# Altium PCB 106729.PcbDoc
Units mil, origin at the board's own origin, x right, y up, seen from the top; angles counter-clockwise.
Board outline 3550 x 5159.72 mil, 2 copper layers (Top Layer, Bottom Layer); 38 components, 39 nets, 135 pads, 78 vias.
Unrouted connection lines stored in the file: 9.
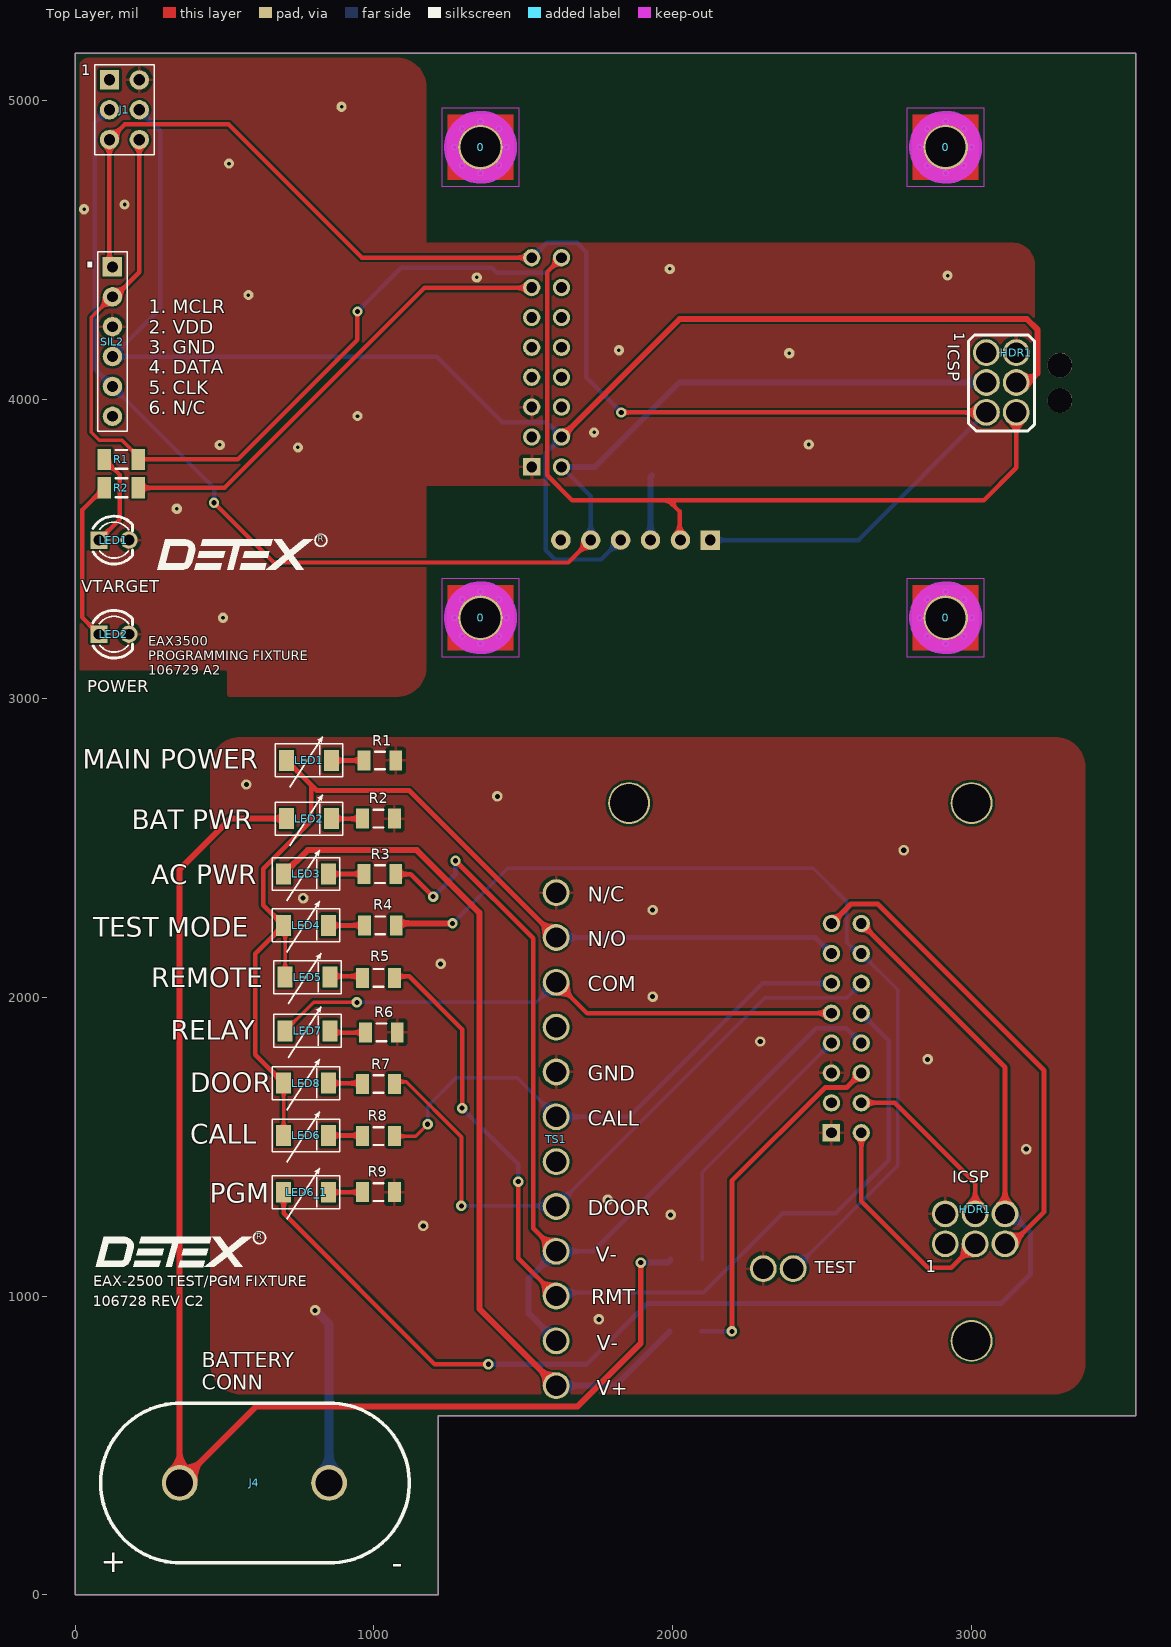
[diagram p0: Top Layer view]
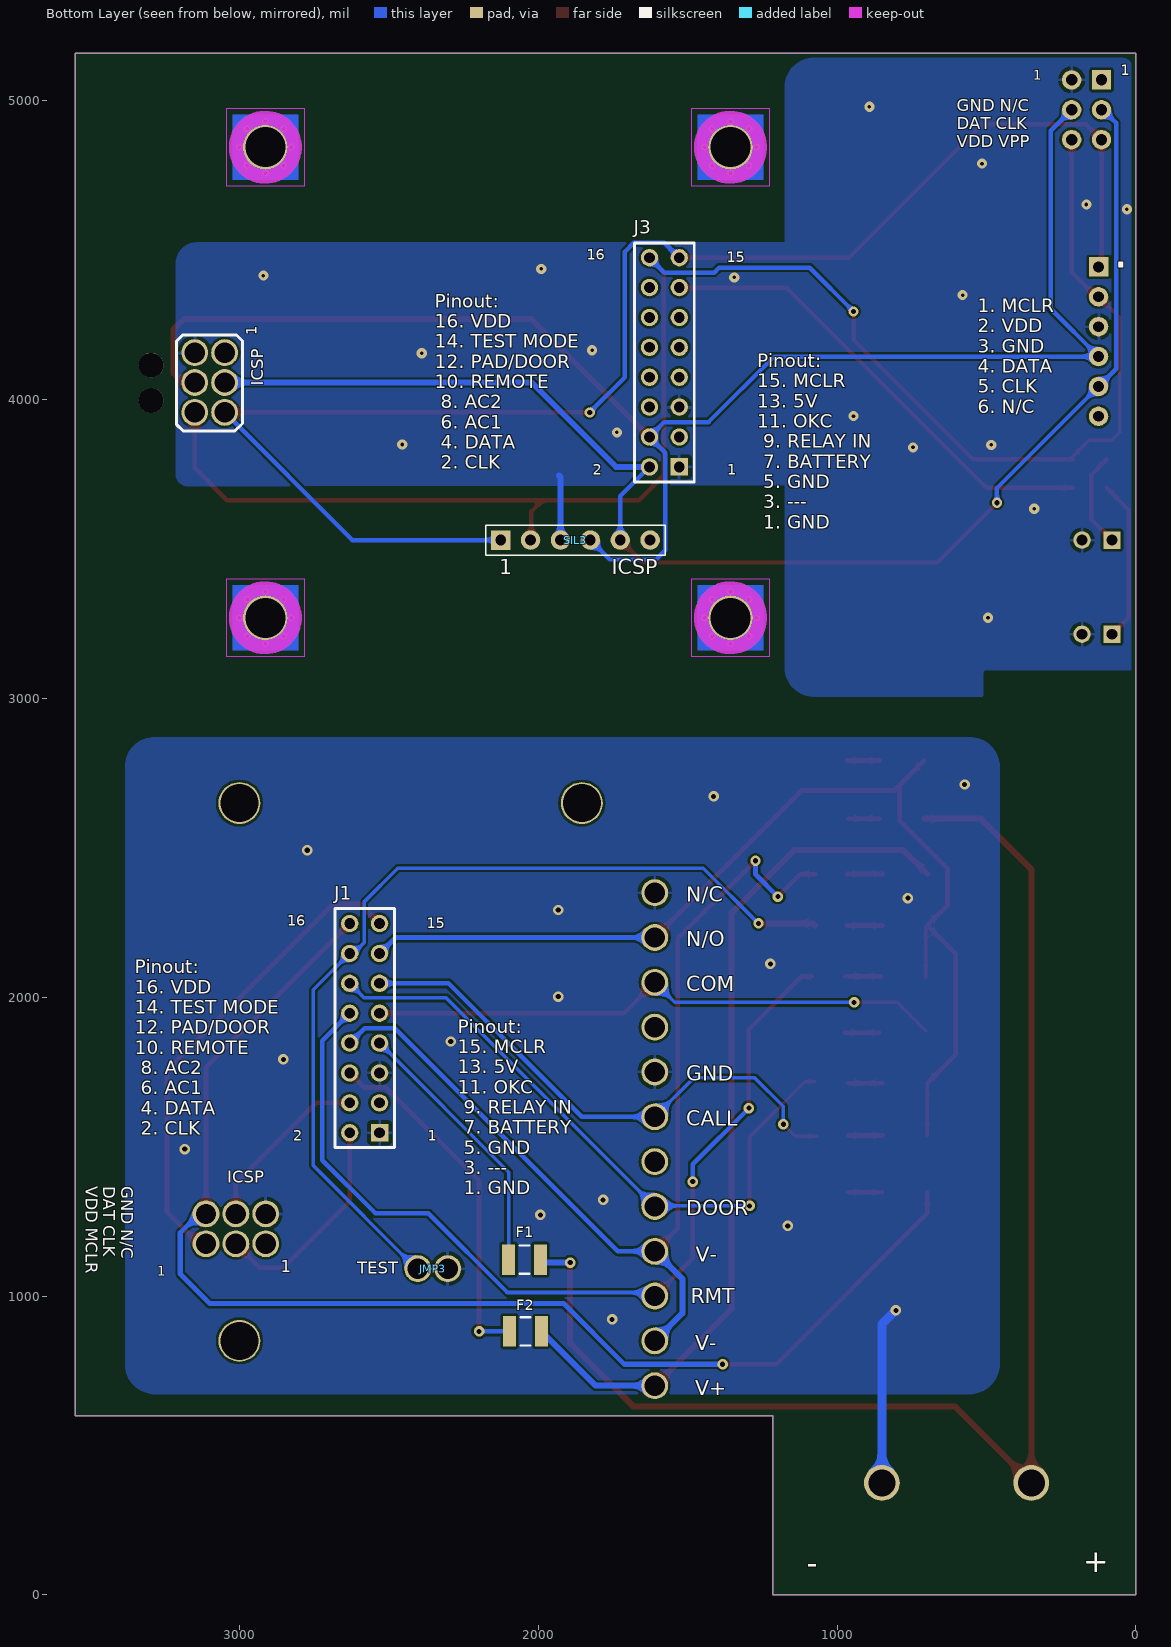
[diagram p1: Bottom Layer view, seen from below]

## Layer stack, top to bottom
Top Solder: solder mask 0.4, Solder Resist, Dk 3.5
Top Layer: signal copper 1.4
Dielectric1: dielectric 12.6, FR-4, Dk 4.8
Bottom Layer: signal copper 1.4
Bottom Solder: solder mask 0.4, Solder Resist, Dk 3.5

## Board outline
0,0 1215,0 1215,600 3550,600 3550,5159.72 0,5159.72

## Design rules (kind name [scope] priority, off if disabled: settings)
AssemblyTestPointUsage [All] p1: valid=2
BoardOutlineClearance [All] p1: gap=15 ignorepadtopadclearanceinfootprint=FALSE
Clearance [All] p1: gap=8 ignorepadtopadclearanceinfootprint=FALSE except(0: Arc-Hole Track-Hole SMDPad-Hole THPad-Hole Via-Hole Fill-Hole Poly-Hole Region-Hole Text-Hole)
ComponentClearance [All] p1 off: gap=10 collisioncheckmode=3 verticalgap=10 showdistances=FALSE
FabricationTestPointUsage TestPointUsage [All] p1 off: valid=0 allowmultiple=FALSE
FabricationTestpoint Testpoint [All] p1 off: side=3 testpointundercomponent=TRUE minsize=40 maxsize=100 preferedsize=60 minholesize=0 maxholesize=40 preferedholesize=32 testpointgrid=1 allowsidetop=TRUE allowsidebottom=TRUE usegrid=TRUE gridtolerance=0.01
FanoutControl Fanout_BGA [IsBGA] p1 off: bgadir=Out bgaviamode=Centered fanoutstyle=Auto fanoutdirection=Alternating viagrid=1 // Fanout_BGA (Default Rule)
Height [All] p1 off: minheight=0 maxheight=1000 prefheight=500
HoleSize [All] p1: absolutevalues=TRUE maxlimit=200 minlimit=1 maxpercent=80.000 minpercent=20.000
HoleToHoleClearance [All] p1: gap=8 allowstackedmicrovias=TRUE
MinimumSolderMaskSliver [All] p1: minsoldermaskwidth=7
PlaneClearance [All] p1: clearance=15
PlaneConnect [All] p1: planeconnectstyle=Relief reliefexpansion=20 reliefentries=4 reliefconductorwidth=10 reliefairgap=15
PolygonConnect "Direct Connect Vias" [IsVia] p1: connectstyle=Direct reliefconductorwidth=10 reliefentries=4 polygonreliefangle="90 Angle" airgapwidth=12
PolygonConnect [All] p2: connectstyle=Relief reliefconductorwidth=10 reliefentries=4 polygonreliefangle="90 Angle" airgapwidth=12
RoutingVias [All] p1: holewidth=22 width=35 viastyle="Through Hole" minholewidth=17 minwidth=30 maxholewidth=28 maxwidth=50
SilkToSilkClearance [All] p1 off: silktosilkclearance=10
SilkToSolderMaskClearance SilkscreenOverComponentPads [IsPad] p1 off: minsilkscreentomaskgap=6 clearancetoexposedcopper=TRUE
SolderMaskExpansion [All] p1: expansion=4
UnConnectedPin [(InPadClass('All Pads'))] p1:
UnRoutedNet [All] p1: checkbadconnections=TRUE
Width [All] p1: maxlimit=200 minlimit=7 preferedwidth=12
16 further rules are at their usual default settings.

## Classes and differential pairs
component class 106728_C1: 0 F1 F2 J3
component class 106729_revA0: J3 LED1 R1 SIL2 SIL3

## Components (designator, comment, footprint, x,y, rotation, side; value= is the part's Value field where it differs from the comment)
0 "Comment" Mounting-Hole-Altium 1356.69,3269.96 r180 top locked
0 "Comment" Mounting-Hole-Altium 2913.38,3269.96 r270 top locked
0 "Comment" Mounting-Hole-Altium 2913.38,4844.76 r0 top locked
0 "Comment" Mounting-Hole-Altium 1356.69,4844.76 r180 top locked
F1 "Comment" 14-1210 2046,1122 r180 bottom
F2 "Comment" 14-1210 2043,882 r0 bottom
HDR1 "ICSP" HRD6PIN 3149.6,4157.36 r0 top
HDR1 "ICSP" HRD6PIN 3012,1290 r90 top
J1 "Comment" H2X3-2.54 165,4970 r0 top
J1 "15C_2ROW_HEADER" "16C_2P HEADER" 2531,2246.66 r0 bottom (schematic designator J3)
J3 "15C_2ROW_HEADER" "16C_2P HEADER" 1528,4475 r0 bottom
J4 "{Value}" CON8030#1 350,375 r180 top
JMP3 "test" CON8030#2 2303,1092 r90 bottom
LED1 "304090041" LED2-2.54-D3.0MM 130,3530 r0 top
LED1 "MAIN POWER" LED_1206 708,2792.6 r0 top
LED2 "304090041" LED2-2.54-D3.0MM 130,3215 r0 top
LED2 "BAT PWR" LED_1206 708,2597.6 r0 top
LED3 "AC PWR" LED_1206 698,2412.6 r0 top
LED4 "TEST MODE" LED_1206 698,2240.6 r0 top
LED5 "REMOTE" LED_1206 703,2067.6 r0 top
LED6 "CALL" LED_1206 698,1537.6 r0 top
LED6_1 "PGM" LED_1206 698,1347.6 r0 top
LED7 "RELAY" LED_1206 703,1887.6 r0 top
LED8 "DOOR" LED_1206 698,1712.6 r0 top
R1 "301020010" RESC1206(3216)_N 155,3800 r0 top
R1 "Comment" C1206 1020,2792.6 r180 top
R2 "301020010" RESC1206(3216)_N 155,3705 r180 top
R2 "Comment" C1206 1015,2597.6 r0 top
R3 "Comment" C1206 1020,2412 r0 top
R4 "Comment" C1206 1021.5,2240.6 r0 top
R5 "Comment" C1206 1015,2065.32 r0 top
R6 "Comment" C1206 1025,1882.71 r180 top
R7 "Comment" C1206 1015,1710 r180 top
R8 "Comment" C1206 1015,1535 r0 top
R9 "Comment" C1206 1015,1347.6 r0 top
SIL2 "ICSP" H6-2.54 125,4194.25 r0 top
SIL3 "ICSP" H6-2.54 1875.66,3530 r90 bottom
TS1 "" CON12EE 1609,699 r90 top

## Footprints (in the part's own frame and the unit in brackets; to place one, negate y for a bottom-side part, rotate by r counter-clockwise, add the part's x,y. Pads: shape width x height; smd on the part's side, far side on the other; paste and mask are expansions set on the pad)
14-1210 [mm] "Chip Resistor, Body 3.2x2.5mm, IPC High Density"
  rect 1.1x2.6 smd: 1(-1.35,0) 2(1.35,0)
  silkscreen extent -0.4,-1.2 0.4,1.2, body extent -1.68,-1.32 1.68,1.32, height 0.9
"16C_2P HEADER" [mil]
  round 58 hole 36: 1(0,0) 2(100,0) 3(0,100) 4(100,100) 5(0,200) 6(100,200) 7(0,300) 8(100,300) 9(0,400) 10(100,400) 11(0,500) 12(100,500) 13(0,600) 14(100,600) 16(100,700)
  rect 58x58 hole 36: 15(0,700)
  silkscreen extent -50,-50 150,750
C1206 [mm] "Chip Capacitor, Body 3.2x1.6mm, IPC High Density"
  rect 1.1x1.7 smd: 1(-1.35,0) 2(1.35,0)
  silkscreen extent -0.4,-0.75 0.4,0.75, body extent -1.7,-0.9 1.7,0.9, height 1.3
CON12EE [mil]
  round 90 hole 68: 1(1,-1) 2(151,-1) 3(301,-1) 4(451,-1) 5(601,-1) 6(751,-1) 7(901,-1) 8(1051,-1) 9(1201,-1) 10(1351,-1) 11(1501,-1) 12(1651,-1)
CON8030#1 [mil]
  round 120 hole 90: 1(0,0) 2(-500,0)
CON8030#2 [mil]
  round 90 hole 68: 1(0,0) 2(0,100)
H2X3-2.54 [mil]
  rect 65x65 hole 38: 1(-50,100)
  round 65 hole 38: 2(50,100) 3(-50,0) 4(50,0) 5(-50,-100) 6(50,-100)
  silkscreen extent -100,-150 100,150
H6-2.54 [mil]
  rect 65x65 hole 36: 1(0,250)
  round 65 hole 36: 2(0,150) 3(0,50) 4(0,-50) 5(0,-150) 6(0,-250)
  silkscreen extent -50,-300 50,300
HRD6PIN [mil]
LED2-2.54-D3.0MM [mil]
  rect 58x58 hole 36: A(-50,0)
  round 58 hole 36: K(50,0)
  silkscreen extent -71,-80 62,80
LED_1206 [mil]
  rect 50x70 smd: 1(0,0) 2(150,0)
  silkscreen extent -38,-90 188,80
Mounting-Hole-Altium [mm] "Mounting Hole, Altium, 3.8mm pad, 3.4mm plated hole"
  round 3.8 hole 3.4 mask+0.038: MOUNT(0,0)
  Top Layer circle w1: c0,0 r2.3
  Top Layer region: -2.8,-2.801 2.8,-2.801 2.8,2.799 -2.8,2.799
  Top Layer keep-out region: -3.3,-3.299 3.3,-3.299 3.3,3.301 -3.3,3.301
  Bottom Layer region: -2.8,-2.801 2.8,-2.801 2.8,2.799 -2.8,2.799
  Bottom Layer keep-out region: -3.3,-3.299 3.3,-3.299 3.3,3.301 -3.3,3.301
  Keep-Out Layer circle w1.2: c0,0 r2.5
RESC1206(3216)_N [mm] "Chip Resistor, Body 3.2x1.6mm, IPC Medium Density"
  rect 1.15x1.8 smd: 1(-1.45,0) 2(1.45,0)
  silkscreen extent -0.5,-0.8 0.5,0.8, body extent -1.67,-0.87 1.67,0.87, height 0.75

## Part data
J1: library part DIP-BLACK-MALE-HEADER(2X3P-2.54)-2.54
J1 J3: library part MHDR2X8
LED1 LED2: library part DIP-LED-RED-RED(2P-D3MM)
R1 R2: library part DIP-RES-2.2K-5%-1/4W(PR-D2.3XL6.5MM)
SIL2: "In-Circuit Serial Programming Header"

## Free pads (board coordinates)
  round 140 hole 128: 0(1854,2650) 0(3000,850) 0(3000,2650)
  round 82.68 hole 82.68 unplated: 0(3295.67,3997.36) 0(3295.67,4115.48)
  round 90 hole 68: 1(2912,1175) 1(3049.6,4157.36) 2(2912,1275) 2(3149.6,4157.36) 3(3012,1175) 3(3049.6,4057.36) 4(3012,1275) 4(3149.6,4057.36) 5(3049.6,3957.36) 5(3112,1175) 6(3112,1275) 6(3149.6,3957.36)

## Via types
v1: diameter 23.62, hole 11.81, Top Layer to Bottom Layer, 32 vias
v2: diameter 35, hole 17, Top Layer to Bottom Layer, tented both sides, 25 vias
v3: diameter 34, hole 12, Top Layer to Bottom Layer, tented both sides, 17 vias
v4: diameter 34, hole 17, Top Layer to Bottom Layer, tented both sides, 3 vias
v5: diameter 34, hole 17, Top Layer to Bottom Layer, 1 vias

## Nets (pads, with @x,y where several pads share a name; then routed paths per layer and width w, separated by ;. In a path a pad name is that pad's centre, name@x,y a point inside that pad or via, vN(x,y) a via of type N, cw(c..) or ccw(c..) an arc to the next point about the centre after c; other vN are vias at no path point)
5V: J1.3@2531,2146.66 LED1.1 LED4.1 LED5.1 LED6.1 LED8.1 TS1.11 | length 3604.6
  Top Layer w12: LED6.1 LED8.1 ; LED5.1 LED4.1@703,2235.6
  Top Layer w16: LED8.1 603,1807.6 603,2145.6 LED4.1 630,2308.6 630,2430 790.25,2590.25 790.25,2710.35 ; LED1.1 790.25,2710.35 ; TS1.11 1118,2692 808.6,2692 790.25,2710.35
  Bottom Layer w16: TS1.11 2477.32,2200 2530.66,2146.66 J1.3@2531,2146.66
CALL: J1.5@2531,2046.66 R8.2 TS1.7 | length 1817.6
  Top Layer w12: R8.2 1140,1535 v4(1180,1575)
  Bottom Layer w12: v4(1180,1575) 1180,1635 1275,1730 1480,1730 TS1.7
  Bottom Layer w15: TS1.7 1854,1600 2300.66,2046.66 J1.5@2531,2046.66
CLK: J1.3@115,4970 J1.16 J3.16 pad.3 SIL2.5 SIL3.5 | length 5437.8
  Top Layer w15: v4(465,3655) 665,3455 1650.66,3455 SIL3.5 ; J1.16 2631,1317 2853,1095 2932,1095 pad.3@3012,1175
  Bottom Layer w15: J1.3@115,4970 110,4970 66,4926 66,4103.25 SIL2.5 465,3704.25 v4(465,3655) ; J3.16 1725.66,3677.34 SIL3.5
  Bottom Layer w20: J3.16 1740,3775 2022.36,4057.36 pad.3@3049.6,4057.36
DATA: J1.4@215,4970 J1.14 J3.14 pad.4 SIL2.4 SIL3.4 | length 5823.3
  Top Layer w15: J1.14 2631.34,1647 2743,1647 3012,1378 pad.4@3012,1275
  Top Layer w20: J3.14 2023,4270 3185,4270 3220,4235 3220,4087.84 3189.53,4057.36 pad.4@3149.6,4057.36
  Bottom Layer w15: J1.4@215,4970 285,4900 285,4304.25 SIL2.4 1210.75,4144.25 1430,3925 1578,3925 J3.14 1574.86,3821.86 1574.86,3495.47 1605.33,3465 1760.66,3465 SIL3.4
DC_PWR: F1.2 J4.1 LED2.1 | length 4592.3
  Top Layer w20: LED2.1 518.6,2597.6 350,2429 J4.1 605,630 1681,630 1893,842 v2(1893,1112)
  Bottom Layer w20: v2(1893,1112) 1982.85,1112 F1.2
DOOR: J1.6@2631,2046.66 R7.1 TS1.5 | length 2173
  Top Layer w12: R7.1@1075,1717.39 1107.76,1717.39 1293,1532.15 v2(1293,1302)
  Bottom Layer w12: v2(1293,1302) 1608,1302 TS1.5 2307.79,1997.79 2582.13,1997.79 J1.6@2631,2046.66
GND: J1.2@215,5070 J1.11 J1.15 J3.11 J3.15 J4.2 JMP3.1 LED1.K LED2.K pad.2 R1.1@1073.15,2792.6 R2.2@1068.15,2597.6 R6.1 R9.2 SIL2.3 SIL3.3 TS1.8 TS1.12 | length 814.3
  Bottom Layer w20: SIL3.3 1925.66,3741.66 1930,3746
  Bottom Layer w30: v2(803,952) 850,905 J4.2
  other v2: 1753,922 1165,1235 1993,1272 1783,1322 3183,1492 2853,1792 2293,1852 1933,2002 1223,2112 1933,2292 763,2332 2773,2492 1413,2672 573,2712
  other v3: 495,3269.96 340,3635 745.78,3840 484,3848.61 2455,3850 1737.01,3890.32 945,3945 2390,4155 1820,4165.34 580,4350 1344,4409 2920,4415 1989.78,4437.68 30,4637 165.85,4653 515,4790 891.72,4980
IO.OKC: 
IO.PAD: 
IO.RELAY_IN: 
IO.REMOTE: 
IO.TEST_MODE: 
MCLR: J1.1@2531,2246.66 J1.5@115,4870 J3.1 pad.5 SIL2.1 SIL3.1 | length 6794.1
  Top Layer w15: SIL2.1 115,4454.25 115,4870 166,4921 514,4921 960,4475 J3.1 ; v4(1827.64,3957.36) pad.5@3049.6,3957.36
  Top Layer w17: J1.1@2531,2246.66 2596.34,2312 2686,2312 3243,1755 3243,1282 3136,1175 pad.5@3112,1175
  Bottom Layer w15: J3.1 1578,4525 1680,4525 1710,4495 1710,4075 v4(1827.64,3957.36) ; SIL3.1@2122.86,3530 2622.24,3530 pad.5@3049.6,3957.36
NET0000: LED1.2 R1.2@966.85,2792.6 | length 108.9
  Top Layer w16: LED1.2 R1.2@966.85,2792.6
NET00002: LED8.2 R7.2 | length 113.9
  Top Layer w16: LED8.2 R7.2@961.85,1712.6
NET1000: LED7.2 R6.2 | length 116.5
  Top Layer w15: LED7.2@858.6,1882 R6.2@975.08,1882
NetJ3_4: J3.3 R2.1@212.09,3705 | length 1593.4
  Top Layer w15: R2.1@212.09,3705 500,3705 1169,4374 1527,4374 J3.3
NetLED1_A: LED1.A R1.1@97.91,3800 | length 320.6
  Top Layer w15: LED1.A 150,3600 150,3747.91 R1.1@97.91,3800
NetR3_1: 
PGC_4: 
PGD_4: 
POWER.AC1_OUT: F2.2 J1.12 | length 1188.2
  Top Layer w16: v2(2198,882) 2198,1386 2510,1698 2582.34,1698 J1.12
  Bottom Layer w16: F2.2 v2@2198,882
POWER.AC2_OUT: J1.10 R3.2 TS1.2 TS1.4 | length 3480.8
  Top Layer w16: R3.2 1123,2412 v2(1198,2337) ; v2(1273,2457) 1533,2197 1533,1227 TS1.4
  Bottom Layer w16: v2(1198,2337) 1273,2412 v2(1273,2457) ; TS1.4 1734.34,1150 2481,1896.66 2581,1896.66 J1.10
  Bottom Layer w20: TS1.2 1518,942 1518,1058 TS1.4
POWER.BAT_PWR: F1.1 J1.9 | length 903.5
  Bottom Layer w12: F1.1 2099.15,1414.81 J1.9
R2_1: LED2.A R2.2@97.91,3705 | length 544
  Top Layer w15: LED2.A 23.83,3271.17 23.83,3630.91 R2.2@97.91,3705
R8_1: LED6.2 R8.1 | length 113.9
  Top Layer w16: LED6.2 R8.1@961.85,1537.6
R9_1: LED6_1.2 R9.1 | length 113.9
  Top Layer w15: LED6_1.2 R9.1
RELAY: J1.7 LED7.1 TS1.10 | length 1938.1
  Top Layer w12: LED7.1 798.4,1983 v2(943,1983)
  Top Layer w15: TS1.10 1713.34,1946.66 J1.7
  Bottom Layer w12: v2(943,1983) 1543,1983 TS1.10
REMOTE: J1.8 R5.2 TS1.3 | length 3137.5
  Top Layer w15: R5.2@1085.42,2070 1117.75,2070 1295,1892.75 v2(1295,1629) ; v2(1483,1383) 1483,1127 TS1.3
  Bottom Layer w15: v2(1295,1629) 1483,1441 v2(1483,1383) ; TS1.3 1622,1012 2103,1012 2368,1277 2545,1277 2723,1455 2723,1854.66 J1.8
TEST: J1.4@2631,2146.66 JMP3.2 R4.2 | length 3087.2
  Top Layer w20: R4.2 1081.06,2247 v2(1263,2247)
  Bottom Layer w12: v2(1263,2247) 1448,2432 2470,2432 2583,2319 2583,2182 2618.34,2146.66 2631,2146.66 2753,2024.66 2753,1437 2408,1092 JMP3.2
U1_1: LED5.2 R5.1 | length 121
  Top Layer w16: LED5.2 855.76,2070.36 R5.1@972.88,2070.36
U1_2: LED3.2 R3.1 | length 118.9
  Top Layer w16: LED3.2 R3.1@966.85,2412.6
U1_3: LED2.2 R2.1@961.85,2597.6 | length 103.9
  Top Layer w16: LED2.2 R2.1@961.85,2597.6
U1_6: LED4.2 R4.1 | length 120.4
  Top Layer w16: LED4.2 R4.1
V+: F2.1 LED3.1 TS1.1 | length 2919.6
  Top Layer w20: LED3.1 778,2492.6 1143.4,2492.6 1353,2283 1353,957 TS1.1
  Bottom Layer w20: TS1.1 1807.85,700 F2.1
VCC: 
VDD: J1.2@2631,2246.66 J1.6@215,4870 J3.2 LED6_1.1 pad.6 R1.2@212.09,3800 SIL2.2 SIL3.2 | length 10066.1
  Top Layer w12: SIL2.2@118.25,4339.25 54,4275 54,3891 81,3864 157,3864 212.09,3808.91 R1.2@212.09,3800
  Top Layer w15: SIL2.2@128.34,4339.25 215,4425.9 J1.6@215,4870 ; R1.2@212.09,3800 545,3800 945,4200 v5(945,4295) ; LED6_1.1 698,1277 1203,772 v2(1383,772) ; J3.2 1580,4427 1580,3746.88 1663.08,3663.8 1985,3663.8 ; SIL3.2 2022.86,3532.8 2022.86,3625.94 1985,3663.8 ; pad.6@3149.6,3957.36 3149.6,3771.89 3041.51,3663.8 1985,3663.8
  Top Layer w17: J1.2@2631,2246.66 3112,1765.66 pad.6@3112,1275
  Bottom Layer w15: v5(945,4295) 1091.5,4441.5 1394.92,4441.5 1411.42,4425 1578,4425 J3.2
  Bottom Layer w17: v2(1383,772) 1712,772 1915,975 3099,975 3198,1074 3198,1212 3138,1272 3115,1272 pad.6@3112,1275
VDD_4: 
VPP/MCLR_4: 
pads on no net: 0.MOUNT J1.1@115,5070 J1.13 J3.4 J3.5 J3.6 J3.7 J3.8 J3.9 J3.10 J3.12 J3.13 SIL2.6 SIL3.6 TS1.6 TS1.9
copper on no net:
  other v1: 1356.69,3183.35 2913.38,3183.35 1295.44,3208.72 1417.94,3208.72 2852.14,3208.72 2974.63,3208.72 1270.08,3269.96 1443.3,3269.96 2826.77,3269.96 3000,3269.96 1295.44,3331.21 1417.94,3331.21 2852.14,3331.21 2974.63,3331.21 1356.69,3356.57 2913.38,3356.57 1356.69,4758.15 2913.38,4758.15 1295.44,4783.51 1417.94,4783.51 2852.14,4783.51 2974.63,4783.51 1270.08,4844.76 1443.3,4844.76 2826.77,4844.76 3000,4844.76 1295.44,4906.01 1417.94,4906.01 2852.14,4906.01 2974.63,4906.01 1356.69,4931.37 2913.38,4931.37

## Polygon pours and split planes (outlines as drawn)
GND on Bottom Layer "GND_L02_P027" (solid, remove dead copper, pour order 27): 3098.32,3709.64 3120,3709.64 3175,3709.64 ccw(c3171.48,3751.48) 3213.32,3755 3213.32,4454.64 ccw(c3139.64,4453.32) 3138.32,4527 585.68,4527 ccw(c605.68,4379.64) 458.32,4359.64 458.32,3849.64 458.32,3729.64 ccw(c473.32,3729.64) 473.29,3714.64
GND on Bottom Layer "GND_L02_P028" (solid, remove dead copper, pour order 28): 875,3005 1075,3005 ccw(c1075,3105) 1175,3105 1175,3380.22 1175,5045 ccw(c1075,5045) 1075,5145 1000,5145 50,5145 ccw(c50,5105) 15,5124.36 15,3096.34 ccw(c20,3105) 20,3095 500,3095 cw(c500,3085) 510,3085 510,3015 ccw(c520,3015) 520,3005
GND on Bottom Layer "GND_L02_P029" (solid, remove dead copper, pour order 29): 456,772 ccw(c556,772) 556,672 3283,672 ccw(c3283,772) 3383,772 3383,2771 ccw(c3283,2771) 3283,2871 556,2871 ccw(c556,2771) 456,2771
GND on Top Layer "GND_L01_P025" (solid, remove dead copper, pour order 25): 875,3005 1075,3005 ccw(c1075,3105) 1175,3105 1175,3380.22 1175,5045 ccw(c1075,5045) 1075,5145 1000,5145 50,5145 ccw(c50,5105) 15,5124.36 15,3096.34 ccw(c20,3105) 20,3095 500,3095 cw(c500,3085) 510,3085 510,3015 ccw(c520,3015) 520,3005
GND on Top Layer "GND_L01_P024" (solid, remove dead copper, pour order 24): 3096.32,3707.64 3201.32,3707.64 3206.32,3707.64 ccw(c3206.32,3712.64) 3211.32,3712.64 3211.32,4452.64 ccw(c3137.64,4451.32) 3136.32,4525 583.68,4525 ccw(c603.68,4377.64) 456.32,4357.64 456.32,3847.64 456.32,3727.64 ccw(c471.32,3727.63) 471.29,3712.64
GND on Top Layer "GND_L01_P026" (solid, remove dead copper, pour order 26): 453,772 ccw(c553,772) 553,672 3280,672 ccw(c3280,772) 3380,772 3380,2771 ccw(c3280,2771) 3280,2871 553,2871 ccw(c553,2771) 453,2771

## Keep-outs
Keep-Out Layer:
  lines w5: 0,0 0,2955 0,5159.72 3550,5159.72 3550,600 1215,600 1215,0 0,0

## Silkscreen, mask and mechanical layers (free items; w line width, h text height)
Top Overlay:
  drawing of 30 lines, arcs and shapes, not listed
  text "1" at 20,5085 h35
  text "." at 24,4441 h120
  text "1" at 2942.06,4225 h35 r270
  text "ICSP" at 2920,4185 h40 r270
  text "1. MCLR / 2. VDD / 3. GND / 4. DATA / 5. CLK / 6. N/C" at 246,3951 h45
  text "R" at 811.69,3517.25 h35
  text "VTARGET" at 20,3355 h40
  text "EAX3500 / PROGRAMMING FIXTURE / 106729 A2" at 245,3080 h32
  text "POWER" at 40,3020 h40
  text "N/C" at 1715,2320 h50
  text "N/O" at 1715,2170 h50
  text "COM" at 1715,2020 h50
  text "GND" at 1715,1720 h50
  text "CALL" at 1715,1570 h50
  text "DOOR" at 1715,1270 h50
  text "R" at 606.19,1183.38 h35
  text "V-" at 1743,1115 h50
  text "1" at 2847,1080 h40
  text "TEST" at 2475,1077.12 h40
  text "EAX-2500 TEST/PGM FIXTURE" at 60.5,1033.38 h35
  text "RMT" at 1728,972 h50
  text "106728 REV C2" at 59.14,965.38 h35
  text "V-" at 1745,818 h50
  text "BATTERY / CONN" at 423,687 h50
  text "V+" at 1745,668 h50
  text "+" at 85,75 h75
  text "-" at 1060,70 h75
Bottom Overlay:
  lines w10: 2989.87,3920.48 3014.87,3895.48 3189.05,3895.48 3209.87,3916.31 3209.87,4196.31 3189.87,4216.31 3009.87,4216.31 2989.87,4196.31 2989.87,3920.48
  text "1" at 50,5085 h35
  text "1" at 344,5070.76 h32
  text "GND N/C / DAT CLK / VDD VPP" at 600,4844.76 h40
  text "16" at 1837,4468.34 h35
  text "15" at 1370,4460 h35
  text "." at 24,4441 h120
  text "1" at 2942.06,4215 h35 r270
  text "ICSP" at 2919.87,4046.31 h40 r270
  text "1. MCLR / 2. VDD / 3. GND / 4. DATA / 5. CLK / 6. N/C" at 530,3955 h45
  text "Pinout: / 16. VDD / 14. TEST MODE / 12. PAD/DOOR / 10. REMOTE /  8. AC2 /  6. AC1 /  4. DATA /  2. CLK" at 2347,3768.34 h45
  text "1" at 1367,3748.34 h35
  text "2" at 1817,3748.34 h35
  text "Pinout: / 15. MCLR / 13. 5V / 11. OKC /  9. RELAY IN /  7. BATTERY /  5. GND /  3. --- /  1. GND" at 1267,3568.34 h45
  text "ICSP" at 1754.34,3415 h50
  text "1" at 2130,3415 h50
  text "N/C" at 1505,2320 h50
  text "16" at 2840,2240 h35
  text "15" at 2373,2231.66 h35
  text "N/O" at 1505,2170 h50
  text "COM" at 1505,2020 h50
  text "GND" at 1505,1720 h50
  text "CALL" at 1505,1570 h50
  text "Pinout: / 16. VDD / 14. TEST MODE / 12. PAD/DOOR / 10. REMOTE /  8. AC2 /  6. AC1 /  4. DATA /  2. CLK" at 3350,1540 h45
  text "1" at 2370,1520 h35
  text "2" at 2820,1520 h35
  text "ICSP" at 3040,1379 h40
  text "GND N/C / DAT CLK / VDD MCLR" at 3515,1367.13 h40 r90
  text "Pinout: / 15. MCLR / 13. 5V / 11. OKC /  9. RELAY IN /  7. BATTERY /  5. GND /  3. --- /  1. GND" at 2270,1340 h45
  text "DOOR" at 1505,1270 h50
  text "V-" at 1473,1115 h50
  text "1" at 2862,1080 h40
  text "TEST" at 2606.19,1075 h40
  text "1" at 3275,1067.56 h32
  text "RMT" at 1490,976 h50
  text "V-" at 1475,818 h50
  text "V+" at 1475,668 h50
  text "+" at 90,75 h75
  text "-" at 1065,70 h75
Bottom Solder:
  text "PCB 106279 A2 / 1.3.2017" at 710,2985 h75
Mechanical 16 - Sheet:
  drawing of 117 lines, arcs and shapes, not listed
  text "1" at -2538.66,7940 h70
  text "2" at 287,7940 h70
  text "3" at 3112,7940 h70
  text "4" at 5953.01,7940 h70
  text "5" at 8787,7940 h70
  text "6" at 11622,7940 h70
  text "A" at -3865,6697 h70
  text "A" at 12935,6697 h70
  text "B" at -3865,3963.02 h70
  text "B" at 12935,3963.02 h70
  text "C" at -3865,1182 h70
  text "C" at 12935,1182 h70
  text "ENGINEER:" at 8410,-1625 h45
  text "TITLE:" at 9910,-1625 h45
  text "D" at -3865,-1640 h70
  text "D" at 12935,-1640 h70
  text "DMH" at 8460,-1745 h70
  text "PCB DESIGNER:" at 8410,-1920 h45
  text "DMH" at 8460,-2045 h70
  text "106729/106728 Combined Boards / EAX2500/EAX3500 TESTER INTERFACE BOARDS" at 9915,-2095 h90
  text "DATE:" at 8410,-2225 h45
  text "PART NO.:" at 9910,-2225 h45
  text "302 Detex Dr" at 6082,-2263.47 h100
  text "N/A" at 9970,-2340 h90
  text ".PRINT_DATE" at 8460,-2345 h70
  text "New Braunfels, TX 78130" at 6082,-2443.19 h100
  text "REV:" at 11995,-2505 h45
  text "FILE NAME:" at 8410,-2525 h45
  text "DWG NO:" at 9910,-2525 h45
  text "(830) 629-2900 x4370" at 6082,-2627.66 h100
  text "A0" at 12015,-2635 h70
  text ".PCB_FILE_NAME_NO_PATH" at 8460,-2645 h70
  text "*" at 9965,-2660 h90
  text "1" at -2538.66,-2860 h70
  text "2" at 287,-2860 h70
  text "3" at 3112,-2860 h70
  text "4" at 5953.01,-2860 h70
  text "5" at 8787,-2860 h70
  text "6" at 11622,-2860 h70
Drill Drawing:
  circle w10: c-1182.6,7123.33 r33.33
  lines w5: -200,2945 -125,2945 ; -150,2960 -125,2945 ; -145,2930 -125,2945 ; 0,0 0,2935 0,5159.72 3550,5159.72 3550,600 1215,600 1215,0 0,0
  lines w10: -1215.93,5890 -1182.6,5906.67 -1149.26,5890 -1165.93,5923.33 -1149.26,5956.67 -1182.6,5940 -1215.93,5956.67 -1199.26,5923.33 -1215.93,5890 ; -1215.93,6190 -1149.26,6190 -1149.26,6256.67 -1215.93,6256.67 -1215.93,6190 ; -1215.93,6340 -1149.26,6340 -1149.26,6406.67 -1215.93,6406.67 -1215.93,6340 ; -1215.93,6506.67 -1199.26,6506.67 -1199.26,6490 -1165.93,6490 -1165.93,6506.67 -1149.26,6506.67 -1149.26,6540 -1165.93,6540 -1165.93,6556.67 -1199.26,6556.67 -1199.26,6540 -1215.93,6540 -1215.93,6506.67 ; -1215.93,6640 -1182.6,6656.67 -1149.26,6640 -1165.93,6673.33 -1149.26,6706.67 -1182.6,6690 -1215.93,6706.67 -1199.26,6673.33 -1215.93,6640 ; -1215.93,6806.67 -1199.26,6806.67 -1182.6,6790 -1165.93,6806.67 -1149.26,6806.67 -1165.93,6823.33 -1149.26,6840 -1165.93,6840 -1182.6,6856.67 -1199.26,6840 -1215.93,6840 -1199.26,6823.33 -1215.93,6806.67 ; -1215.93,6956.67 -1199.26,6956.67 -1182.6,6940 -1165.93,6956.67 -1149.26,6956.67 -1165.93,6973.33 -1149.26,6990 -1165.93,6990 -1182.6,7006.67 -1199.26,6990 -1215.93,6990 -1199.26,6973.33 -1215.93,6956.67 ; -1215.93,7306.67 -1149.26,7306.67 -1182.6,7240 -1215.93,7306.67 ; -1202.6,6353.33 -1162.6,6353.33 -1162.6,6393.33 -1202.6,6393.33 -1202.6,6353.33 ; -1202.6,6513.33 -1192.6,6513.33 -1192.6,6503.33 -1172.6,6503.33 -1172.6,6513.33 -1162.6,6513.33 -1162.6,6533.33 -1172.6,6533.33 -1172.6,6543.33 -1192.6,6543.33 -1192.6,6533.33 -1202.6,6533.33 -1202.6,6513.33 ; -1202.6,6653.33 -1182.6,6663.33 -1162.6,6653.33 -1172.6,6673.33 -1162.6,6693.33 -1182.6,6683.33 -1202.6,6693.33 -1192.6,6673.33 -1202.6,6653.33 ; -1202.6,6813.33 -1192.6,6813.33 -1182.6,6803.33 -1172.6,6813.33 -1162.6,6813.33 -1172.6,6823.33 -1162.6,6833.33 -1172.6,6833.33 -1182.6,6843.33 -1192.6,6833.33 -1202.6,6833.33 -1192.6,6823.33 -1202.6,6813.33
  lines w15: -1275.72,5845 5134.54,5845 ; -1275.72,7345 5134.54,7345 ; -724.84,5695 -724.84,7495 ; -135,5695 -135,7495 ; 1014.66,5695 1014.66,7495 ; 1520.54,5695 1520.54,7495 ; 2254.34,5695 2254.34,7495 ; 3753.89,5695 3753.89,7495 ; 4343.74,5695 4343.74,7495 ; -1275.72,5695 5134.54,5695 5134.54,7495 -1275.72,7495 -1275.72,5695
  lines w20: -80,2945 3935,2945
  text "Symbol" at -1185.72,7390 h72
  text "Count" at -679.84,7390 h72
  text "Hole Size" at -90,7390 h72
  text "Plated" at 1059.66,7390 h72
  text "Hole Type" at 1565.54,7390 h72
  text "Drill Layer Pair" at 2299.34,7390 h72
  text "Via/Pad" at 3798.89,7390 h72
  text "Pad Shape" at 4388.74,7390 h72
  text "2" at -679.84,7240 h60
  text "82.68mil (2.100mm)" at -90,7240 h60
  text "NPTH" at 1059.66,7240 h60
  text "Round" at 1565.54,7240 h60
  text "Top Layer - Bottom Layer" at 2299.34,7240 h60
  text "Pad" at 3798.89,7240 h60
  text "Rounded" at 4388.74,7240 h60
  text "2" at -679.84,7090 h60
  text "90.00mil (2.286mm)" at -90,7090 h60
  text "PTH" at 1059.66,7090 h60
  text "Round" at 1565.54,7090 h60
  text "Top Layer - Bottom Layer" at 2299.34,7090 h60
  text "Pad" at 3798.89,7090 h60
  text "Rounded" at 4388.74,7090 h60
  text "3" at -679.84,6940 h60
  text "128.00mil (3.251mm)" at -90,6940 h60
  text "PTH" at 1059.66,6940 h60
  text "Round" at 1565.54,6940 h60
  text "Top Layer - Bottom Layer" at 2299.34,6940 h60
  text "Pad" at 3798.89,6940 h60
  text "Rounded" at 4388.74,6940 h60
  text "4" at -679.84,6790 h60
  text "133.86mil (3.400mm)" at -90,6790 h60
  text "PTH" at 1059.66,6790 h60
  text "Round" at 1565.54,6790 h60
  text "Top Layer - Bottom Layer" at 2299.34,6790 h60
  text "Pad" at 3798.89,6790 h60
  text "Rounded" at 4388.74,6790 h60
  text "6" at -679.84,6640 h60
  text "38.00mil (0.965mm)" at -90,6640 h60
  text "PTH" at 1059.66,6640 h60
  text "Round" at 1565.54,6640 h60
  text "Top Layer - Bottom Layer" at 2299.34,6640 h60
  text "Pad" at 3798.89,6640 h60
  text "(Mixed)" at 4388.74,6640 h60
  text "17" at -679.84,6490 h60
  text "12.00mil (0.305mm)" at -90,6490 h60
  text "PTH" at 1059.66,6490 h60
  text "Round" at 1565.54,6490 h60
  text "Top Layer - Bottom Layer" at 2299.34,6490 h60
  text "Via" at 3798.89,6490 h60
  text "Rounded" at 4388.74,6490 h60
  text "26" at -679.84,6340 h60
  text "68.00mil (1.727mm)" at -90,6340 h60
  text "PTH" at 1059.66,6340 h60
  text "Round" at 1565.54,6340 h60
  text "Top Layer - Bottom Layer" at 2299.34,6340 h60
  text "Pad" at 3798.89,6340 h60
  text "Rounded" at 4388.74,6340 h60
  text "29" at -679.84,6190 h60
  text "17.00mil (0.432mm)" at -90,6190 h60
  text "PTH" at 1059.66,6190 h60
  text "Round" at 1565.54,6190 h60
  text "Top Layer - Bottom Layer" at 2299.34,6190 h60
  text "Via" at 3798.89,6190 h60
  text "Rounded" at 4388.74,6190 h60
  text "32" at -679.84,6040 h60
  text "11.81mil (0.300mm)" at -90,6040 h60
  text "PTH" at 1059.66,6040 h60
  text "Round" at 1565.54,6040 h60
  text "Top Layer - Bottom Layer" at 2299.34,6040 h60
  text "Via" at 3798.89,6040 h60
  text "Rounded" at 4388.74,6040 h60
  text "A" at -1214.81,6030.01 h66.67
  text "48" at -679.84,5890 h60
  text "36.00mil (0.914mm)" at -90,5890 h60
  text "PTH" at 1059.66,5890 h60
  text "Round" at 1565.54,5890 h60
  text "Top Layer - Bottom Layer" at 2299.34,5890 h60
  text "Pad" at 3798.89,5890 h60
  text "(Mixed)" at 4388.74,5890 h60
  text "169 Total" at -679.84,5740 h60
  text "20mil SCORE" at -855,2915 h60
  text "Daniel Hahaj / Detex Corp / P/N 106728 revC1: EAX2500 Test Board / 106729 revA2 EAX3500 Test Board / (830) 629-2900 x4370 /  / 1OZ Copper Pour, 2 sides / FR4 .062\" thickness / HASL Lead-Free / White Silk, Green Mask, 2 sides / 20mil scoring" at 4435,2890 h120

## Dimensions
0,0 to 0,5159.72 on Drill Drawing
3935,2945 to 3550,5159.72 on Drill Drawing
1215,0 to 1215,600 on Drill Drawing
0,0 to 1215,0 on Drill Drawing
0,5159.72 to 3550,5159.72 on Drill Drawing